# Altium PCB PadV1.2_2025-01-23.pcbdoc
Units mil, origin at the board's own origin, x right, y up, seen from the top; angles counter-clockwise.
Board outline 5692 x 5764 mil, 2 copper layers (Top Layer, Bottom Layer); 41 components, 50 nets, 249 pads, 45 vias.
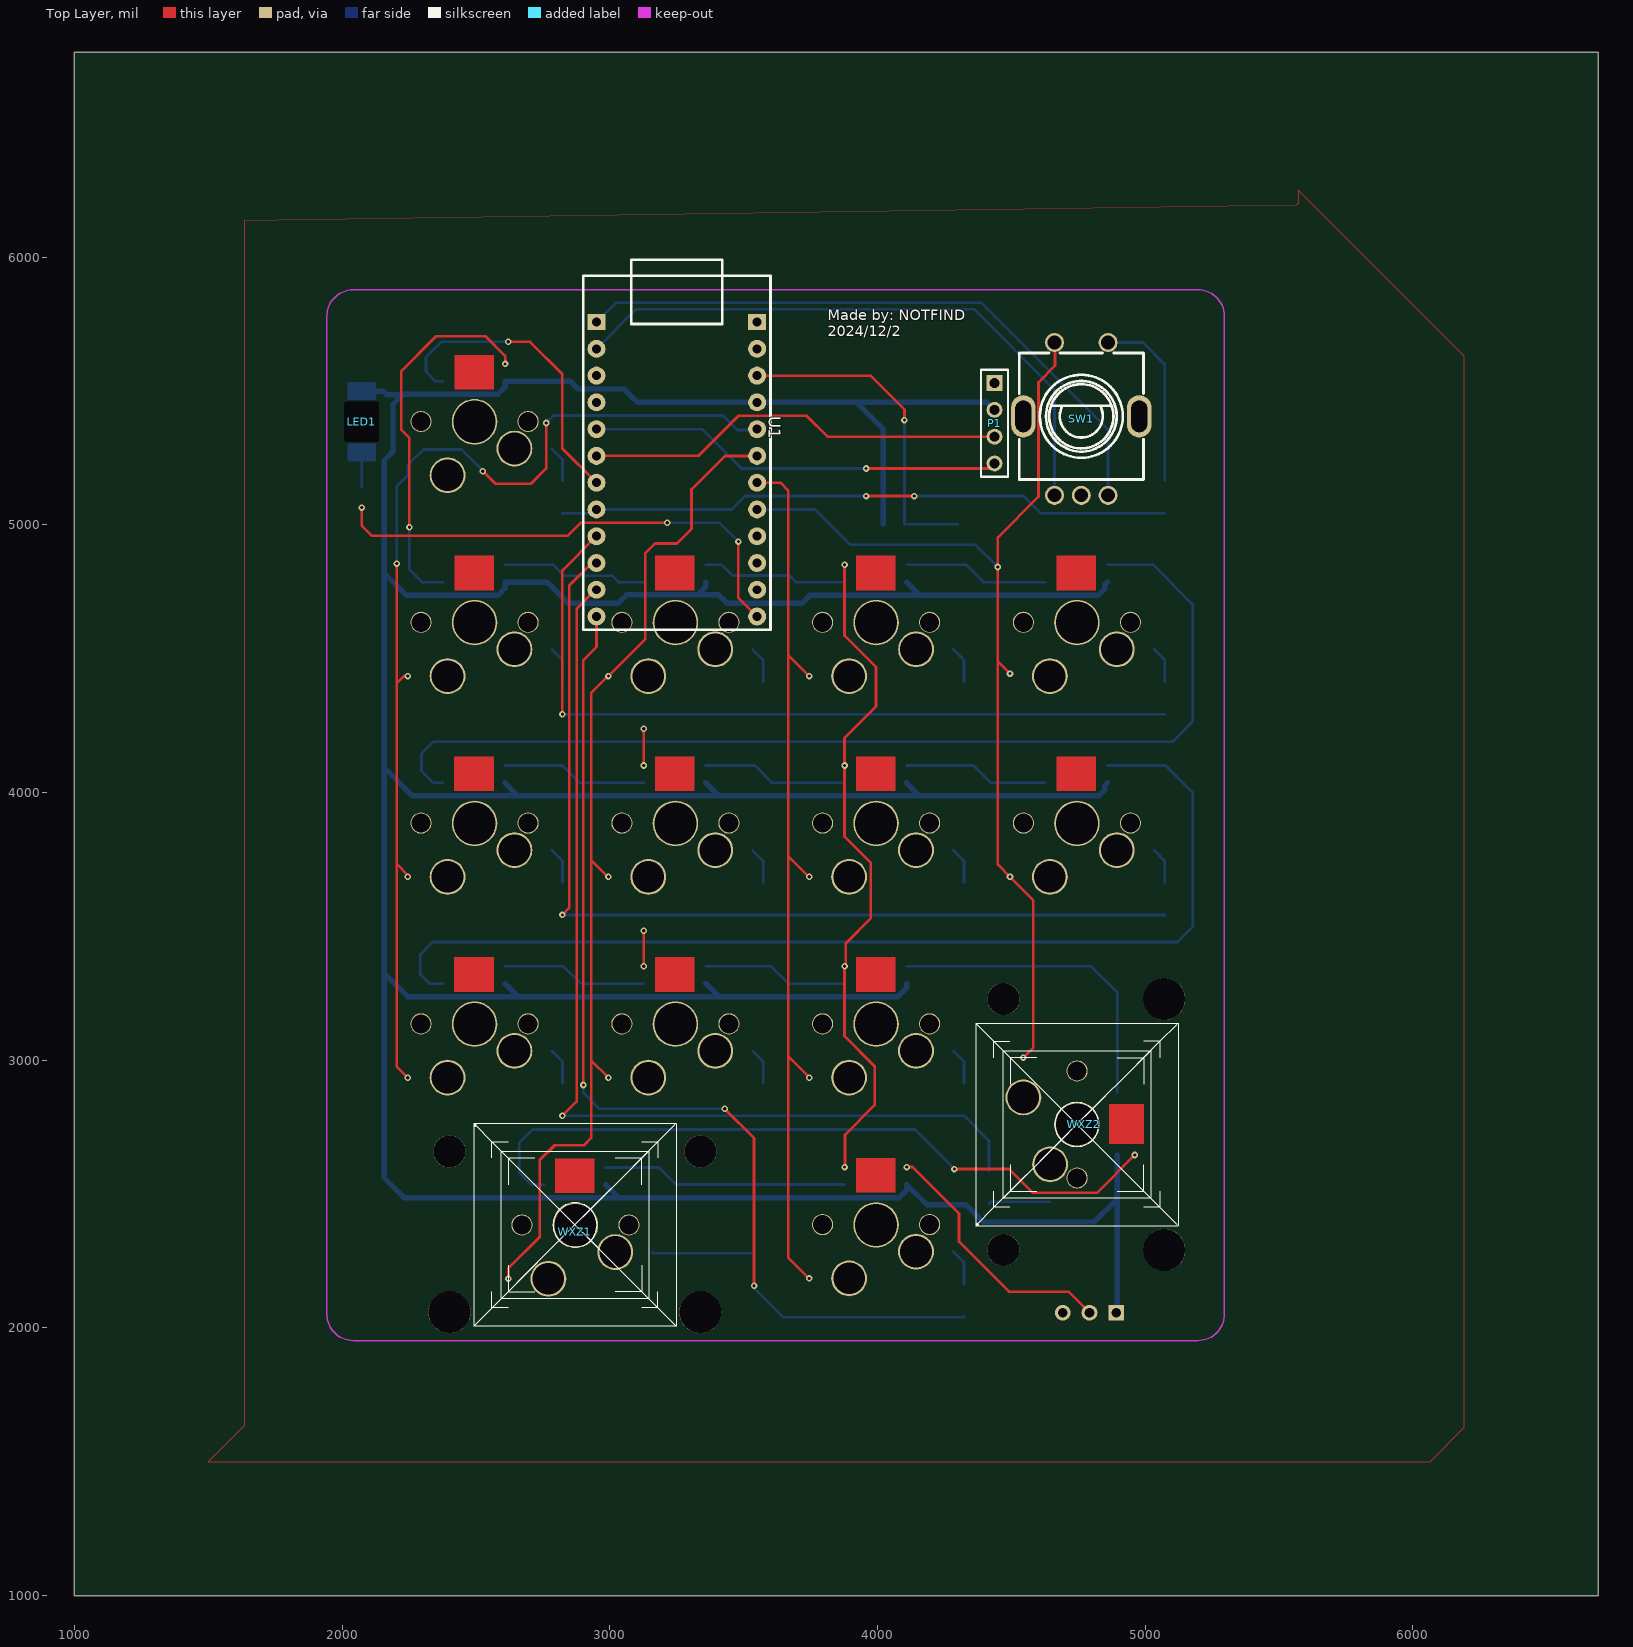
[diagram p0: Top Layer view]
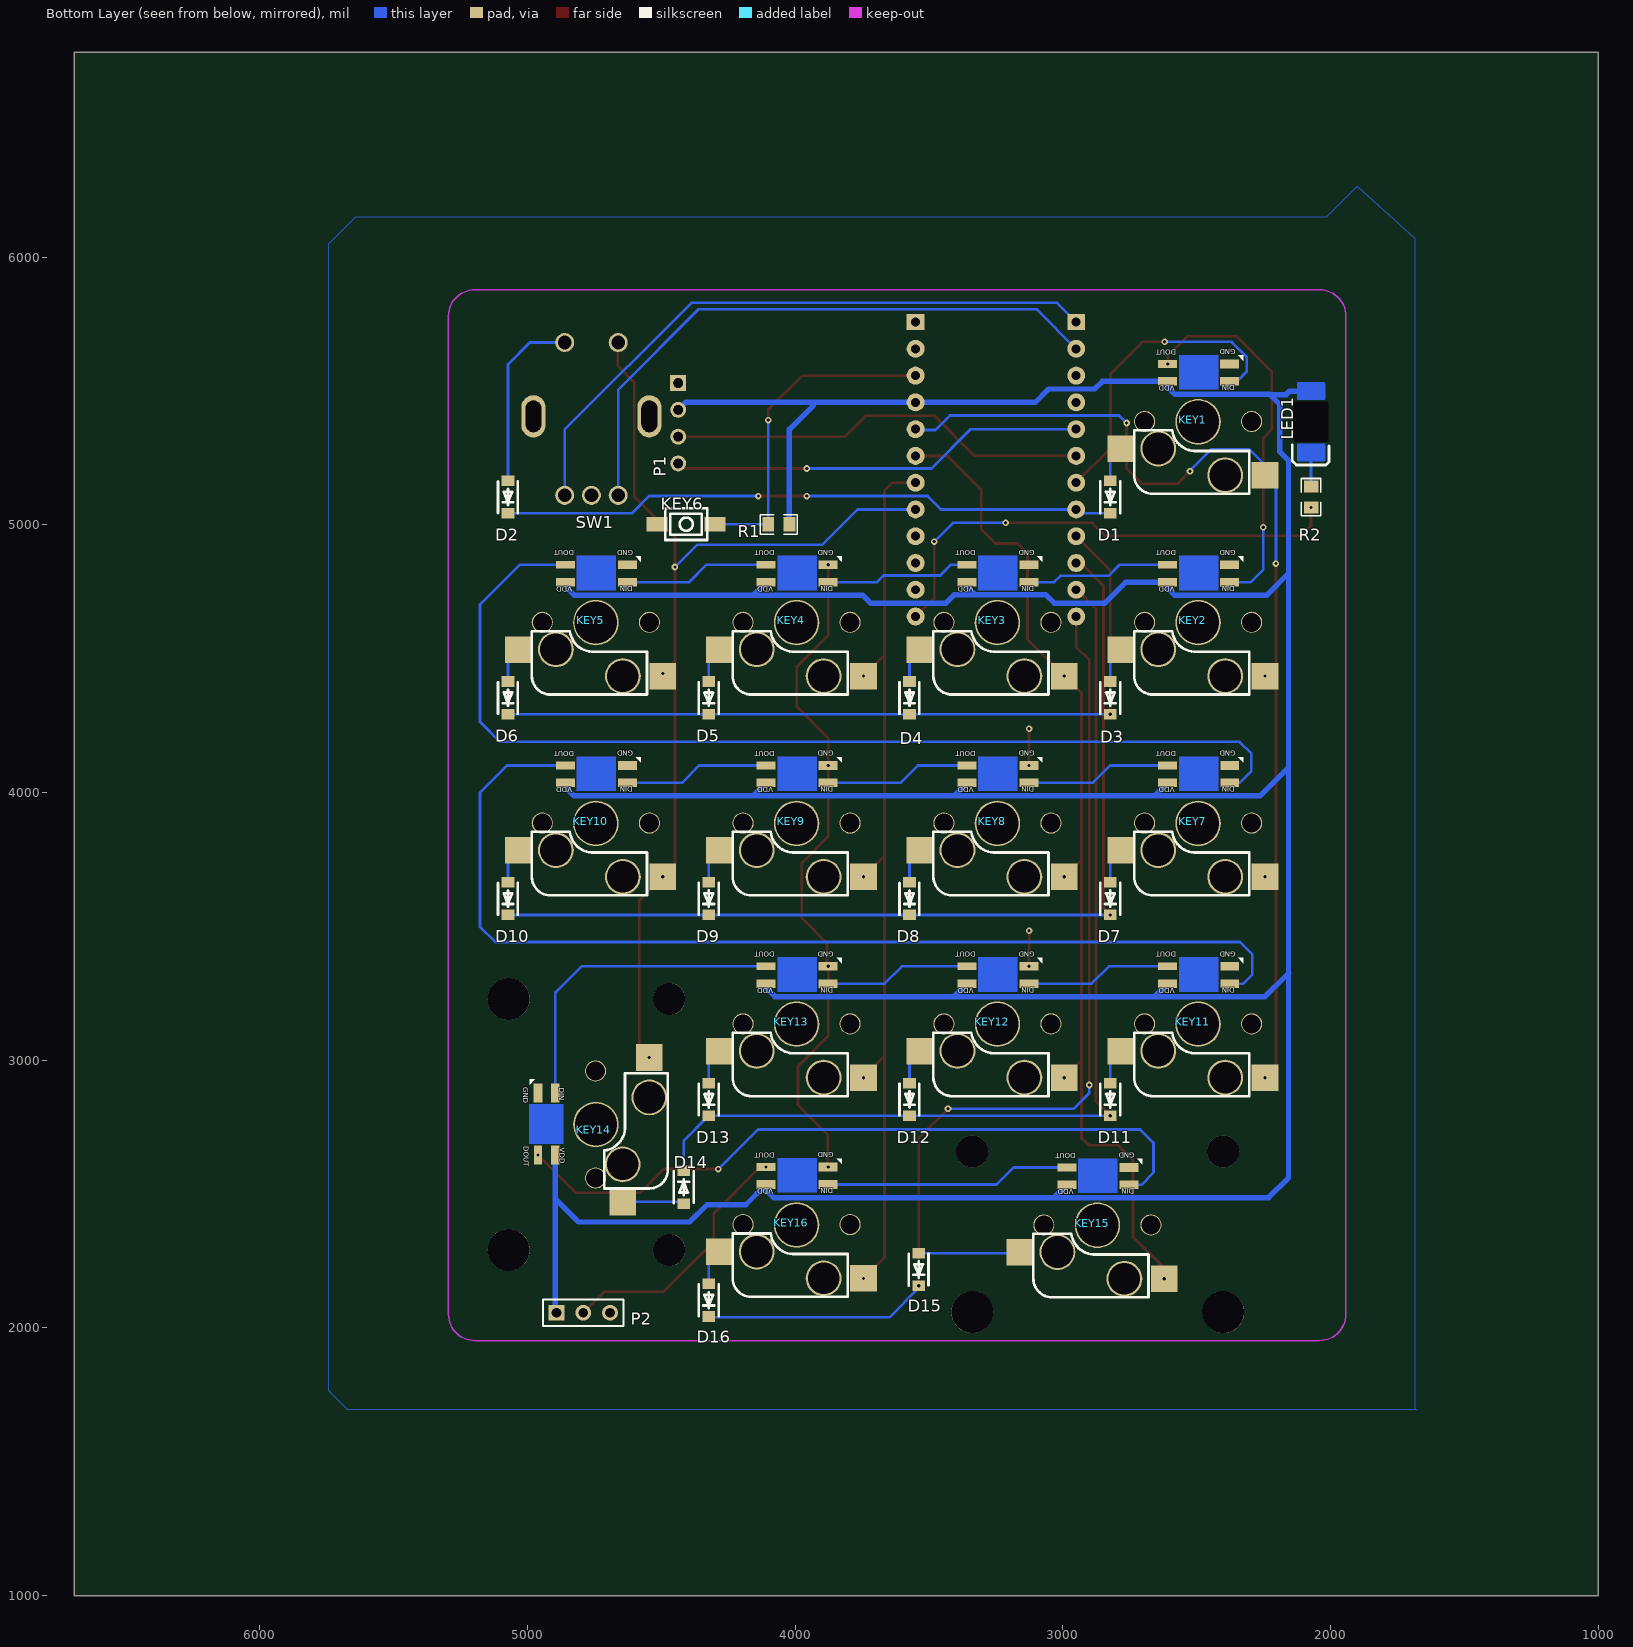
[diagram p1: Bottom Layer view, seen from below]

## Layer stack, top to bottom
Top Layer: signal copper (thickness not stored)
Dielectric: dielectric 12.6, FR-4, Dk 4.8
Bottom Layer: signal copper (thickness not stored)

## Board outline
6692,1000 1000,1000 1000,6764 6692,6764

## Components (designator, comment, footprint, x,y, rotation, side; value= is the part's Value field where it differs from the comment)
D1 "SOD4002-SH" SOD-123F_L2.8-W1.8-LS3.7-RD 2822.64,5103.32 r270 bottom
D2 "SOD4002-SH" SOD-123F_L2.8-W1.8-LS3.7-RD 5072.69,5103.32 r270 bottom
D3 "SOD4002-SH" SOD-123F_L2.8-W1.8-LS3.7-RD 2822.64,4353.3 r270 bottom
D4 "SOD4002-SH" SOD-123F_L2.8-W1.8-LS3.7-RD 3572.66,4353.3 r270 bottom
D5 "SOD4002-SH" SOD-123F_L2.8-W1.8-LS3.7-RD 4322.68,4353.3 r270 bottom
D6 "SOD4002-SH" SOD-123F_L2.8-W1.8-LS3.7-RD 5072.69,4353.3 r270 bottom
D7 "SOD4002-SH" SOD-123F_L2.8-W1.8-LS3.7-RD 2822.64,3603.29 r270 bottom
D8 "SOD4002-SH" SOD-123F_L2.8-W1.8-LS3.7-RD 3572.66,3603.29 r270 bottom
D9 "SOD4002-SH" SOD-123F_L2.8-W1.8-LS3.7-RD 4322.68,3603.29 r270 bottom
D10 "SOD4002-SH" SOD-123F_L2.8-W1.8-LS3.7-RD 5072.69,3603.29 r270 bottom
D11 "SOD4002-SH" SOD-123F_L2.8-W1.8-LS3.7-RD 2822.64,2853.27 r270 bottom
D12 "SOD4002-SH" SOD-123F_L2.8-W1.8-LS3.7-RD 3572.66,2853.27 r270 bottom
D13 "SOD4002-SH" SOD-123F_L2.8-W1.8-LS3.7-RD 4322.68,2853.27 r270 bottom
D14 "SOD4002-SH" SOD-123F_L2.8-W1.8-LS3.7-RD 4416.43,2525.14 r90 bottom
D15 "SOD4002-SH" SOD-123F_L2.8-W1.8-LS3.7-RD 3538.43,2217.7 r270 bottom
D16 "SOD4002-SH" SOD-123F_L2.8-W1.8-LS3.7-RD 4322.68,2103.26 r270 bottom
KEY1 "KAILH_反装_WS2812_反贴_左进" KAILH_反装_WS2182B_反贴_左进 2494.51,5384.58 r0 top
KEY2 "KAILH_反装_WS2812_反贴_左进" KAILH_反装_WS2182B_反贴_左进 2494.51,4634.56 r0 top
KEY3 "KAILH_反装_WS2812_反贴_左进" KAILH_反装_WS2182B_反贴_左进 3244.53,4634.56 r0 top
KEY4 "KAILH_反装_WS2812_反贴_左进" KAILH_反装_WS2182B_反贴_左进 3994.54,4634.56 r0 top
KEY5 "KAILH_反装_WS2812_反贴_左进" KAILH_反装_WS2182B_反贴_左进 4744.56,4634.56 r0 top
KEY6 "Switch3x4x2" KEY-3.0*4.0 4406.98,5001.97 r180 bottom
KEY7 "KAILH_反装_WS2812_反贴_左进" KAILH_反装_WS2182B_反贴_左进 2494.49,3884.5 r0 top
KEY8 "KAILH_反装_WS2812_反贴_左进" KAILH_反装_WS2182B_反贴_左进 3244.49,3884.5 r0 top
KEY9 "KAILH_反装_WS2812_反贴_左进" KAILH_反装_WS2182B_反贴_左进 3994.49,3884.5 r0 top
KEY10 "KAILH_反装_WS2812_反贴_左进" KAILH_反装_WS2182B_反贴_左进 4744.59,3884.5 r0 top
KEY11 "KAILH_反装_WS2812_反贴_左进" KAILH_反装_WS2182B_反贴_左进 2494.49,3134.5 r0 top
KEY12 "KAILH_反装_WS2812_反贴_左进" KAILH_反装_WS2182B_反贴_左进 3244.49,3134.5 r0 top
KEY13 "KAILH_反装_WS2812_反贴_左进" KAILH_反装_WS2182B_反贴_左进 3994.49,3134.5 r0 top
KEY14 "KAILH_反装_WS2812_反贴_左进" KAILH_反装_WS2182B_反贴_左进 4744.49,2759.5 r270 top
KEY15 "KAILH_反装_WS2812_反贴_左进" KAILH_反装_WS2182B_反贴_左进 2871.09,2383.1 r0 top
KEY16 "KAILH_反装_WS2812_反贴_左进" KAILH_反装_WS2182B_反贴_左进 3994.49,2384.5 r0 top
LED1 "3528反贴LED" 3528反贴LED 2072.63,5384.58 r270 top
P1 "4P" 4P 4437,5529 r270 top
P2 "3P" HDR1X3 4791.44,2056.38 r0 bottom
R1 "10K" R0805 4061,5001 r180 bottom
R2 "33" R0805 2072.6,5103.3 r90 bottom
SW1 "EC11直插" SW-TH_EC11E15244G1 4760.97,5395.13 r0 top
U1 "PROMICRO" PROMICRO 3105,5355 r270 top
WXZ1 "2U卫星轴" 2U卫星轴 2869.52,2384.51 r0 top
WXZ2 "2U卫星轴" 2U卫星轴 4744.53,2759.54 r90 top

## Footprints (in the part's own frame and the unit in brackets; to place one, negate y for a bottom-side part, rotate by r counter-clockwise, add the part's x,y. Pads: shape width x height; smd on the part's side, far side on the other; paste and mask are expansions set on the pad)
2U卫星轴 [mil]
  round 156.7 hole 156.7 unplated paste+0: ""(-468.66,-325.98) ""(468.66,-325.98)
  round 120 hole 120 unplated paste+0: ""(-468.66,274.02) ""(468.66,274.02)
  silkscreen extent -378,-378 378,378
4P [mm]
  rect 1.5x1.5 hole 0.9 slot 0.905 at 0 deg paste+0 mask+0.051: 1(0,0)
  round 1.5 hole 0.9 slot 0.905 at 0 deg paste+0 mask+0.051: 2(2.54,0) 3(5.08,0) 4(7.62,0)
  silkscreen extent -1.27,-1.27 8.89,1.27
3528反贴LED [mil]
  Bottom Layer region: -146.73,-47.24 -146.73,47.24 -146.69,47.9 -146.56,48.54 -146.35,49.16 -146.06,49.74 -145.69,50.29 -145.26,50.78 -144.77,51.21 -144.23,51.57 -143.64,51.86 -143.02,52.07 -142.38,52.2 -141.73,52.24 -86.61,52.24 -85.96,52.2 -85.32,52.07 -84.7,51.86 -84.11,51.57 -83.57,51.21 -83.07,50.78 -82.64,50.29 -82.28,49.74 -81.99,49.16 -81.78,48.54 -81.65,47.9 -81.61,47.24 -81.61,-47.24 -81.65,-47.9 -81.78,-48.54 -81.99,-49.16 -82.28,-49.74 -82.64,-50.29 -83.07,-50.78 -83.57,-51.21 -84.11,-51.57 -84.7,-51.86 -85.32,-52.07 -85.96,-52.2 -86.61,-52.24 -141.73,-52.24 -142.38,-52.2 -143.02,-52.07 -143.64,-51.86 -144.23,-51.57 -144.77,-51.21 -145.26,-50.78 -145.69,-50.29 -146.06,-49.74 -146.35,-49.16 -146.56,-48.54 -146.69,-47.9
  Bottom Layer region: 81.61,-47.24 81.61,47.24 81.65,47.9 81.78,48.54 81.99,49.16 82.28,49.74 82.64,50.29 83.07,50.78 83.57,51.21 84.11,51.57 84.7,51.86 85.32,52.07 85.96,52.2 86.61,52.24 141.73,52.24 142.38,52.2 143.02,52.07 143.64,51.86 144.23,51.57 144.77,51.21 145.26,50.78 145.69,50.29 146.06,49.74 146.35,49.16 146.56,48.54 146.69,47.9 146.73,47.24 146.73,-47.24 146.69,-47.9 146.56,-48.54 146.35,-49.16 146.06,-49.74 145.69,-50.29 145.26,-50.78 144.77,-51.21 144.23,-51.57 143.64,-51.86 143.02,-52.07 142.38,-52.2 141.73,-52.24 86.61,-52.24 85.96,-52.2 85.32,-52.07 84.7,-51.86 84.11,-51.57 83.57,-51.21 83.07,-50.78 82.64,-50.29 82.28,-49.74 81.99,-49.16 81.78,-48.54 81.65,-47.9
  Multi-Layer board cut-out: -73.88,-59.06 -73.88,59.05 -73.5,60.97 -72.42,62.59 -70.8,63.67 -68.88,64.05 -68.88,64.05 68.91,64.05 70.83,63.67 72.45,62.59 73.53,60.97 73.91,59.05 73.91,59.05 73.91,-59.06 73.53,-60.97 72.45,-62.59 70.83,-63.68 68.91,-64.06 68.91,-64.06 -68.88,-64.06 -70.8,-63.68 -72.42,-62.59 -73.5,-60.97 -73.88,-59.06 -73.88,-59.06
HDR1X3 [mil]
  rect 59x59 hole 36 paste+0 mask+2: 1(100,0)
  round 59 hole 36 paste+0 mask+2: 2(0,0) 3(-100,0)
  silkscreen extent -150,-50 150,50
KAILH_反装_WS2182B_反贴_左进 [mm]
  rect 2.55x2.5 smd far side paste+0 mask+0.102: COL(-6.349,-5.08) ROW(7.341,-2.566)
  rect 1.8x0.82 smd far side paste+0 mask+0.102: DIN(-2.997,3.835) GND(-2.997,5.486) VDD(2.896,3.835)
  rect 1.8x0.75 smd far side paste+0 mask+0.102: DOUT(2.896,5.486)
  round 2 hole 1.8 unplated paste+0: ""(-5.079,0.025) ""(5.081,0.025)
  round 3.4 hole 3 paste+0 mask+0.102: ""(-2.565,-5.08) ""(3.785,-2.54)
  round 4.318 hole 4 unplated paste+0 mask+0.102: ""(0,0)
  Multi-Layer region: -1.904,6.324 -1.904,3.073 1.804,3.073 1.804,6.324
KEY-3.0*4.0 [mm]
  rect 2x1.4 smd paste+0 mask+0.051: 1(2.752,-0.001) 2(-2.752,0.001)
  silkscreen extent -1.99,-1.5 2.01,1.5
PROMICRO [mm]
  rect 1.524x1.7 hole 0.85 paste+0 mask+0.051: 1(-10.212,11.303) 13(-10.212,-3.937)
  round 1.7 hole 0.85 paste+0 mask+0.051: 2(-7.672,11.303) 3(-5.132,11.303) 4(-2.592,11.303) 5(-0.052,11.303) 6(2.488,11.303) 7(5.028,11.303) 8(7.568,11.303) 9(10.108,11.303) 10(12.648,11.303) 11(15.188,11.303) 12(17.728,11.303) 14(-7.672,-3.937) 15(-5.132,-3.937) 16(-2.592,-3.937) 17(-0.052,-3.937) 18(2.488,-3.937) 19(5.028,-3.937) 20(7.568,-3.937) 21(10.108,-3.937) 22(12.648,-3.937) 23(15.188,-3.937) 24(17.728,-3.937)
  silkscreen extent -16.13,-5.21 19,12.57
R0805 [mil]
  rect 44.59x54.21 smd paste-3937.01 mask+2: 1(39.37,0) 2(-39.37,0)
  silkscreen extent -69,-36 69,36
SOD-123F_L2.8-W1.8-LS3.7-RD [mm]
  rect 1x1.2 smd paste+0 mask+0.051: 1(1.55,0) 2(-1.55,0)
  silkscreen extent -1.49,-0.95 1.52,0.93
SW-TH_EC11E15244G1 [mm]
  oval 2.3x4 hole 1.5 slot 3 at 90 deg paste+0 mask+0.051: 6(5.5,0.25) 7(-5.5,0.25)
  round 1.8 hole 1.3 paste+0 mask+0.051: A(-2.54,-7.25) B(2.54,-7.25) C(0,-7.25) D(-2.54,7.25) E(2.54,7.25)
  silkscreen extent -5.9,-5.75 5.9,6.25

## Via types
v1: diameter 24.41, hole 12.2, Top Layer to Bottom Layer, tented both sides, 45 vias

## Nets (pads, with @x,y where several pads share a name; then routed paths per layer and width w, separated by ;. In a path a pad name is that pad's centre, name@x,y a point inside that pad or via, vN(x,y) a via of type N, cw(c..) or ccw(c..) an arc to the next point about the centre after c; other vN are vias at no path point)
COL0: KEY1.COL KEY2.COL KEY7.COL KEY11.COL U1.5 | length 4162.2
  Top Layer w10: 2204,3732.61 2244.55,3692.06 v1(2244.55,3684.54) ; 2204,4296.48 v1(2204,4855) ; v1(2244.55,2934.54) 2204,2975.09 2204,4408 2230.55,4434.55 v1(2244.54,4434.55) ; v1(2525,5200) 2572,5153 2705,5153 2762,5210 v1(2762,5380)
  Bottom Layer w10: v1(2204,4855) 2204,5144 KEY1.COL ; KEY1.COL 2244.54,5222.54 2303,5281 2446,5281 2525,5202 v1(2525,5200) ; v1(2762,5380) 2790,5408 3422,5408 3476,5354 3547,5354 U1.5
COL1: KEY3.COL KEY8.COL KEY12.COL KEY15.COL U1.6 | length 3823.5
  Top Layer w10: v1(2621.08,2183.06) 2621.1,2223.1 2738,2340 2738,2626 2794,2682 2903,2682 2930,2709 2930,4371 2993.5,4434.5 2994.5,4434.5 3132,4572 3132,4893 3169,4930 3251,4930 3305,4984 3305,5132 3430.1,5257 U1.6 ; 2930,2999.4 v1@2994.5,2934.5 ; 2930,3747.43 2992.89,3684.54 v1(2994.55,3684.54)
  other v1: 2994.55,2934.54 2994.55,4434.55
COL2: KEY4.COL KEY9.COL KEY13.COL KEY16.COL U1.7 | length 3439.4
  Top Layer w10: U1.7 3637,5157 3666,5128 3666,4513.1 ; 3666,3015.46 3744.55,2936.91 v1(3744.55,2934.54) ; 3666,3762.6 v1@3744.5,3684.5 ; v1(3744.55,2184.54) 3666,2263.09 3666,4513.1 ; v1@3744.6,4434.5 3666,4513.1
  other v1: 3744.55,3684.54 3744.57,4434.55
COL3: KEY5.COL KEY10.COL KEY14.COL SW1.D U1.8 | length 3882.9
  Top Layer w10: 4449,4488.6 v1(4494.59,4443.96) ; v1(4494.59,3684.54) 4582,3597 4582,3047 v1(4544.52,3009.52) ; v1(4494.59,3684.54) 4449,3730.13 v1(4449,4842.02) 4449,4953 4601,5105 4601,5532 4663,5594 4663,5678.53 SW1.D
  Bottom Layer w10: U1.8 3766.95,5057.05 3899,4925 4366.02,4925 v1(4449,4842.02)
D2_2: D2.2 SW1.E | length 680.4
  Bottom Layer w10: SW1.E 4991.4,5680.6 5072.7,5599.3 D2.2
D3_2: D3.2 KEY2.ROW | length 135.4
  Bottom Layer w10: KEY2.ROW 2822.64,4494.45 D3.2
D7_2: D7.2 KEY7.ROW | length 135.4
  Bottom Layer w10: KEY7.ROW@2783.55,3783.54 2822.64,3744.45 D7.2
D12_2: D12.2 KEY12.ROW | length 135.4
  Bottom Layer w10: KEY12.ROW@3533.55,3033.54 3572.66,2994.43 D12.2
D13_2: D13.2 KEY13.ROW | length 135.5
  Bottom Layer w10: KEY13.ROW@4283.55,3033.54 4322.68,2994.41 D13.2
D14_2: D14.2 KEY14.ROW | length 229.7
  Bottom Layer w10: D14.2 4422.83,2470.52 KEY14.ROW
E1: SW1.B U1.13 | length 2383
  Bottom Layer w10: U1.13 3022,5829 4388,5829 4861,5356 SW1.B
E2: SW1.A U1.14 | length 2291.3
  Bottom Layer w10: U1.14 3097.9,5805 4360,5805 4661,5504 SW1.A
GND: KEY1.GND KEY2.GND KEY3.GND KEY4.GND KEY5.GND KEY6.2 KEY7.GND KEY8.GND KEY9.GND KEY10.GND KEY11.GND KEY12.GND KEY13.GND KEY14.GND KEY15.GND KEY16.GND P1.1 P2.3 SW1.6 SW1.7 SW1.C U1.2 U1.15 U1.16 | length 2792.1
  Top Layer w10: v1(3126,3483) v1(3126.55,3350.53) ; v1(3126,4238) 3126.55,4237.45 v1(3126.55,4100.53) ; v1(3876.55,2600.53) 3878,2601.98 3878,2721 3989,2832 3989,2977 3876.55,3089.45 v1(3876.55,3350.53) 3881,3354.98 3881,3436 3975,3530 3975,3736 3876.55,3834.45 v1(3876.55,4100.53) ; v1(3876.55,4100.53) 3876.6,4203.5 3994,4321 3994,4468 3876.6,4585.4 v1@3876.6,4850.5
  other v1: 3876.57,4850.55
KEY1_DOUT: KEY1.DOUT KEY2.DIN | length 1401.7
  Top Layer w10: v1(2251,4991) 2251,5324 2220,5355 2220,5573 2351,5704 2535,5704 2608.5,5630.5 v1(2608.54,5600.57)
  Bottom Layer w10: v1(2251,4991) 2251,4832 2297.45,4785.55 KEY2.DIN
KEY1_ROW: D1.2 KEY1.ROW | length 135.4
  Bottom Layer w10: KEY1.ROW 2822.64,5244.47 D1.2
KEY3_DIN: KEY2.DOUT KEY3.DIN | length 545.1
  Bottom Layer w10: KEY2.DOUT 2787.4,4850.6 2829,4809 3009,4809 3032.4,4785.5 KEY3.DIN@3126.6,4785.5
KEY3_ROW: D4.2 KEY3.ROW | length 135.4
  Bottom Layer w10: KEY3.ROW 3572.66,4494.44 D4.2
KEY4_DIN: KEY3.DOUT KEY4.DIN | length 545
  Bottom Layer w10: KEY3.DOUT 3417.39,4850.56 3457.95,4810 3670,4810 3694.5,4785.5 KEY4.DIN@3876.6,4785.5
KEY4_ROW: D5.2 KEY4.ROW | length 135.4
  Bottom Layer w10: KEY4.ROW 4322.68,4494.44 D5.2
KEY5_DIN: KEY4.DOUT KEY5.DIN | length 545
  Bottom Layer w10: KEY4.DOUT 4330.5,4850.6 4395.5,4785.5 KEY5.DIN@4626.6,4785.5
KEY5_DOUT: KEY5.DOUT KEY7.DIN | length 3912.2
  Bottom Layer w10: KEY7.DIN@2376.55,4035.54 2340.46,4035.54 2296,4080 2296,4145 2340,4189 5102,4189 5177,4264 5177,4702 5028.44,4850.56 KEY5.DOUT
KEY5_ROW: D6.2 KEY5.ROW | length 135.4
  Bottom Layer w10: KEY5.ROW 5072.69,4494.45 D6.2
KEY8_DIN: KEY7.DOUT KEY8.DIN | length 544.9
  Bottom Layer w10: KEY7.DOUT@2608.55,4100.54 2823.46,4100.54 2888.46,4035.54 KEY8.DIN@3126.55,4035.54
KEY8_ROW: D8.2 KEY8.ROW | length 135.4
  Bottom Layer w10: KEY8.ROW@3533.55,3783.54 3572.66,3744.43 D8.2
KEY9_DIN: KEY8.DOUT KEY9.DIN | length 544.9
  Bottom Layer w10: KEY8.DOUT@3358.55,4100.54 3541.46,4100.54 3606.46,4035.54 KEY9.DIN@3876.55,4035.54
KEY9_ROW: D9.2 KEY9.ROW | length 135.4
  Bottom Layer w10: KEY9.ROW@4283.55,3783.54 4322.68,3744.41 D9.2
KEY10_DIN: KEY9.DOUT KEY10.DIN | length 545
  Bottom Layer w10: KEY9.DOUT@4108.55,4100.54 4358.46,4100.54 4423.46,4035.54 KEY10.DIN
KEY10_DOUT: KEY10.DOUT KEY11.DIN | length 3964.1
  Bottom Layer w10: KEY11.DIN@2376.55,3285.54 2325.46,3285.54 2292,3319 2292,3395 2338,3441 5120,3441 5177,3498 5177,4000 5076.46,4100.54 KEY10.DOUT
KEY10_ROW: D10.2 KEY10.ROW | length 135.4
  Bottom Layer w10: KEY10.ROW 5072.69,3744.44 D10.2
KEY11_DOUT: KEY11.DOUT KEY12.DIN | length 544.9
  Bottom Layer w10: KEY11.DOUT@2608.55,3350.54 2827.46,3350.54 2892.46,3285.54 KEY12.DIN@3126.55,3285.54
KEY11_ROW: D11.2 KEY11.ROW | length 135.4
  Bottom Layer w10: KEY11.ROW@2783.55,3033.54 2822.64,2994.45 D11.2
KEY12_DOUT: KEY12.DOUT KEY13.DIN | length 544.9
  Bottom Layer w10: KEY12.DOUT@3358.55,3350.54 3601.46,3350.54 3666.46,3285.54 KEY13.DIN@3876.55,3285.54
KEY13_DOUT: KEY13.DOUT KEY14.DIN | length 1202.5
  Bottom Layer w10: KEY13.DOUT@4108.55,3350.54 4797.46,3350.54 4895.52,3252.48 KEY14.DIN
KEY14_DOUT: KEY14.DOUT KEY15.DIN | length 2699.1
  Top Layer w10: v1(4287,2593) 4491,2593 4580,2504 4819,2504 v1(4960.53,2645.52)
  Bottom Layer w10: KEY15.DIN 2706.94,2534.06 2661,2580 2661,2691 2711,2741 4139,2741 v1(4287,2593)
KEY15_ROW: D15.2 KEY15.ROW | length 379.7
  Bottom Layer w10: KEY15.ROW 3163.42,2278.72 D15.2
KEY16_DIN: KEY15.DOUT KEY16.DIN | length 917.8
  Bottom Layer w10: KEY15.DOUT 3183.9,2599.1 3247.5,2535.5 KEY16.DIN@3876.6,2535.5
KEY16_DOUT: KEY16.DOUT P2.2 | length 969.8
  Top Layer w10: v1(4108.55,2600.54) 4130.46,2600.54 4304,2427 4304,2322 4491,2135 4712.82,2135 P2.2
KEY16_ROW: D16.2 KEY16.ROW | length 135.5
  Bottom Layer w10: KEY16.ROW@4283.55,2283.54 4322.68,2244.41 D16.2
LED1_2: R2.1 | length 127.7
  Bottom Layer w10: R2.1 2072.63,5270.41
NUM_LOCK: R2.2 U1.12 | length 1848.3
  Top Layer w10: v1(2072.63,5063.95) 2072.63,4996.37 2110,4959 2843,4959 2891,5007 v1(3214,5007) ; v1(3480,4937) 3480,4727.05 U1.12
  Bottom Layer w10: v1(3214,5007) 3410,5007 v1(3480,4937)
RESET: KEY6.1 R1.2 U1.3 | length 1230.1
  Top Layer w10: U1.3 3973,5557 4100.4,5429.6 v1(4100.37,5391)
  Bottom Layer w10: R1.2 v1(4100.37,5391) ; R1.2 KEY6.1@4298.7,5002
RGB: KEY1.DIN U1.19 | length 1173.9
  Top Layer w10: v1(2620,5683) 2702,5683 2822,5563 2822,5285.05 U1.19
  Bottom Layer w10: KEY1.DIN 2349.4,5535.6 2313,5572 2313,5626 2370,5683 v1(2620,5683)
ROW0: D1.1 D2.1 U1.20 | length 2303.7
  Top Layer w10: v1(3957,5107) v1(4137,5107)
  Bottom Layer w10: D1.1 2935.25,5042.3 U1.20 3455.05,5057.05 3505,5107 v1(3957,5107) ; v1(4137,5107) 4545.6,5107 4610.3,5042.3 D2.1
ROW1: D3.1 D4.1 D5.1 D6.1 U1.21 | length 2967.6
  Top Layer w10: v1(2822.64,4292.28) 2822.6,4829.7 U1.21
  Bottom Layer w10: v1(2822.64,4292.28) D6.1
ROW2: D7.1 D8.1 D9.1 D10.1 U1.22 | length 3627.5
  Top Layer w10: v1(2822.64,3542.27) 2848,3567.6 2848,4772 2933,4857 U1.22
  Bottom Layer w10: v1(2822.64,3542.27) D10.1
ROW3: D11.1 D12.1 D13.1 D14.1 U1.23 | length 3764.2
  Top Layer w10: v1(2822.64,2792.25) 2876,2845.61 2876,4686 2947.05,4757.05 U1.23
  Bottom Layer w10: v1(2822.64,2792.25) D13.1 4416.43,2698.5 D14.1
ROW4: D15.1 D16.1 U1.24 | length 3899.8
  Top Layer w10: v1(2901,2907) 2901,4494 2950,4543 U1.24 ; v1(3429,2818) 3538.4,2708.6 v1(3538.4,2156.7)
  Bottom Layer w10: v1(2901,2907) 2901,2878 2961,2818 v1(3429,2818) ; v1(3538.4,2156.7) 3538.4,2148.6 3648,2039 4322.7,2039 D16.1
SCL: P1.3 U1.18 | length 1581.4
  Top Layer w10: U1.18 3330.05,5257.05 3480,5407 3735,5407 3813,5329 P1.3
SDA: P1.4 U1.17 | length 1555.8
  Top Layer w10: v1(3957,5210) 4418,5210 P1.4
  Bottom Layer w10: U1.17 3343.95,5357.05 3491,5210 v1(3957,5210)
VCC: KEY1.VDD KEY2.VDD KEY3.VDD KEY4.VDD KEY5.VDD KEY7.VDD KEY8.VDD KEY9.VDD KEY10.VDD KEY11.VDD KEY12.VDD KEY13.VDD KEY14.VDD KEY15.VDD KEY16.VDD P1.2 P2.1 R1.1 U1.4 | length 17735.6
  Bottom Layer w20: 2072.63,5498.75 2153.25,5498.75 2166,5486 2227,5486 ; 2156,3326 2245,3237 4076,3237 4108.5,3269.5 KEY13.VDD ; 2157,4818.7 2239.7,4736 2581.66,4736 2608.54,4762.88 KEY2.VDD ; 2159,4091 2263,3987 4826,3987 4848.6,4009.6 4848.6,4025.5 KEY10.VDD ; KEY2.VDD@2608.5,4785.5 2764.5,4785.5 2843,4707 3032,4707 3063,4738 3327,4738 ; KEY1.VDD 2608.5,5514.5 2581,5487 2227,5487 2190,5450 2190,5273 2157,5240 2157,2560 2231,2486 4067,2486 4081,2486 4108.5,2513.6 KEY16.VDD 4184.5,2459.6 4329.5,2459.6 4394,2395 4809,2395 4895.5,2481.5 4895.5,2528.8 ; KEY11.VDD@2608.55,3285.54 2657.09,3237 2659.82,3237 ; KEY7.VDD@2608.55,4035.54 2657.09,3987 2664.28,3987 ; KEY1.VDD 2852.43,5535.57 2881,5507 3053,5507 3102.95,5457.05 U1.4 4408.95,5457.05 P1.2 ; KEY15.VDD 3033.14,2486 3067.16,2486 ; KEY12.VDD@3358.55,3285.54 3407.09,3237 3417.72,3237 ; KEY8.VDD@3358.55,4035.54 3407.09,3987 3422.13,3987 ; KEY3.VDD 3358.55,4769.55 3327,4738 ; 3924.9,5457.05 3931.63,5450.32 3931.63,5446 4021.63,5356 R1.1 ; KEY9.VDD@4108.55,4035.54 4157.09,3987 4179.99,3987 ; KEY4.VDD 4158.12,4736 4165.8,4736 ; KEY5.VDD@4858.6,4785.5 4848.6,4775.5 4848.6,4760.6 4824,4736 3747,4736 3717,4706 3437.1,4707 3406.1,4738 3327,4738 ; P2.1 4895.52,2060.46 KEY14.VDD
pads on no net: KEY1. KEY2. KEY3. KEY4. KEY5. KEY7. KEY8. KEY9. KEY10. KEY11. KEY12. KEY13. KEY14. KEY15. KEY16. U1.1 U1.9 U1.10 U1.11 WXZ1. WXZ2.

## Polygon pours and split planes (outlines as drawn)
GND on Bottom Layer (solid): 1685,6071 1685,1700 1678,1693 5671,1693 5742,1764 5742,6050 5642,6150 2014,6150 1900,6264
GND on Top Layer (solid): 1635,6136 1635,1635 1500,1500 6064,1500 6192,1628 6192,5629 5571,6250 5571,6200 5564,6193

## Keep-outs
Keep-Out Layer:
  lines w5: 1942.84,2050.84 ccw(c2041.26,2050.84) 2041.26,1952.42 ; 1942.84,5779.16 cw(c2041.26,5779.16) 2041.26,5877.58 ; 5196.74,1952.42 ccw(c5196.74,2050.84) 5295.16,2050.84 ; 5196.74,5877.58 cw(c5196.74,5779.16) 5295.16,5779.16

## Silkscreen, mask and mechanical layers (free items; w line width, h text height)
Top Overlay:
  text "Made by: NOTFIND / 2024/12/2" at 3814,5704 h40

## Text inside footprints (layer, text, board x,y; h text height)
KEY1: Bottom Overlay "GND" at 2354.95,5655 h19.68 r180; Bottom Overlay "VDD" at 2581.95,5519 h19.68 r180; Bottom Overlay "DOUT" at 2575.95,5654 h19.68 r180; Bottom Overlay "DIN" at 2356.95,5521 h19.68 r180
KEY2: Bottom Overlay "GND" at 2354.95,4904.98 h19.68 r180; Bottom Overlay "VDD" at 2581.95,4768.98 h19.68 r180; Bottom Overlay "DOUT" at 2575.95,4903.98 h19.68 r180; Bottom Overlay "DIN" at 2356.95,4770.98 h19.68 r180
KEY3: Bottom Overlay "GND" at 3104.97,4904.98 h19.68 r180; Bottom Overlay "VDD" at 3331.97,4768.98 h19.68 r180; Bottom Overlay "DOUT" at 3325.97,4903.98 h19.68 r180; Bottom Overlay "DIN" at 3106.97,4770.98 h19.68 r180
KEY4: Bottom Overlay "GND" at 3854.98,4904.98 h19.68 r180; Bottom Overlay "VDD" at 4081.98,4768.98 h19.68 r180; Bottom Overlay "DOUT" at 4075.98,4903.98 h19.68 r180; Bottom Overlay "DIN" at 3856.98,4770.98 h19.68 r180
KEY5: Bottom Overlay "GND" at 4605,4904.98 h19.68 r180; Bottom Overlay "VDD" at 4832,4768.98 h19.68 r180; Bottom Overlay "DOUT" at 4826,4903.98 h19.68 r180; Bottom Overlay "DIN" at 4607,4770.98 h19.68 r180
KEY7: Bottom Overlay "GND" at 2354.93,4154.92 h19.68 r180; Bottom Overlay "VDD" at 2581.93,4018.92 h19.68 r180; Bottom Overlay "DOUT" at 2575.93,4153.92 h19.68 r180; Bottom Overlay "DIN" at 2356.93,4020.92 h19.68 r180
KEY8: Bottom Overlay "GND" at 3104.93,4154.92 h19.68 r180; Bottom Overlay "VDD" at 3331.93,4018.92 h19.68 r180; Bottom Overlay "DOUT" at 3325.93,4153.92 h19.68 r180; Bottom Overlay "DIN" at 3106.93,4020.92 h19.68 r180
KEY9: Bottom Overlay "GND" at 3854.93,4154.92 h19.68 r180; Bottom Overlay "VDD" at 4081.93,4018.92 h19.68 r180; Bottom Overlay "DOUT" at 4075.93,4153.92 h19.68 r180; Bottom Overlay "DIN" at 3856.93,4020.92 h19.68 r180
KEY10: Bottom Overlay "GND" at 4605.03,4154.92 h19.68 r180; Bottom Overlay "VDD" at 4832.03,4018.92 h19.68 r180; Bottom Overlay "DOUT" at 4826.03,4153.92 h19.68 r180; Bottom Overlay "DIN" at 4607.03,4020.92 h19.68 r180
KEY11: Bottom Overlay "GND" at 2354.93,3404.92 h19.68 r180; Bottom Overlay "VDD" at 2581.93,3268.92 h19.68 r180; Bottom Overlay "DOUT" at 2575.93,3403.92 h19.68 r180; Bottom Overlay "DIN" at 2356.93,3270.92 h19.68 r180
KEY12: Bottom Overlay "GND" at 3104.93,3404.92 h19.68 r180; Bottom Overlay "VDD" at 3331.93,3268.92 h19.68 r180; Bottom Overlay "DOUT" at 3325.93,3403.92 h19.68 r180; Bottom Overlay "DIN" at 3106.93,3270.92 h19.68 r180
KEY13: Bottom Overlay "GND" at 3854.93,3404.92 h19.68 r180; Bottom Overlay "VDD" at 4081.93,3268.92 h19.68 r180; Bottom Overlay "DOUT" at 4075.93,3403.92 h19.68 r180; Bottom Overlay "DIN" at 3856.93,3270.92 h19.68 r180
KEY14: Bottom Overlay "GND" at 5014.91,2899.06 h19.68 r90; Bottom Overlay "VDD" at 4878.91,2672.06 h19.68 r90; Bottom Overlay "DOUT" at 5013.91,2678.06 h19.68 r90; Bottom Overlay "DIN" at 4880.91,2897.06 h19.68 r90
KEY15: Bottom Overlay "GND" at 2731.53,2653.52 h19.68 r180; Bottom Overlay "VDD" at 2958.53,2517.52 h19.68 r180; Bottom Overlay "DOUT" at 2952.53,2652.52 h19.68 r180; Bottom Overlay "DIN" at 2733.53,2519.52 h19.68 r180
KEY16: Bottom Overlay "GND" at 3854.93,2654.92 h19.68 r180; Bottom Overlay "VDD" at 4081.93,2518.92 h19.68 r180; Bottom Overlay "DOUT" at 4075.93,2653.92 h19.68 r180; Bottom Overlay "DIN" at 3856.93,2520.92 h19.68 r180